# Altium PCB pcb.PcbDoc
Units mm, origin at the board's own origin, x right, y up, seen from the top; angles counter-clockwise.
Board outline 22 x 100 mm, 2 copper layers (Top Layer, Bottom Layer); 61 components, 37 nets, 181 pads, 23 vias.
Unrouted connection lines stored in the file: 84.
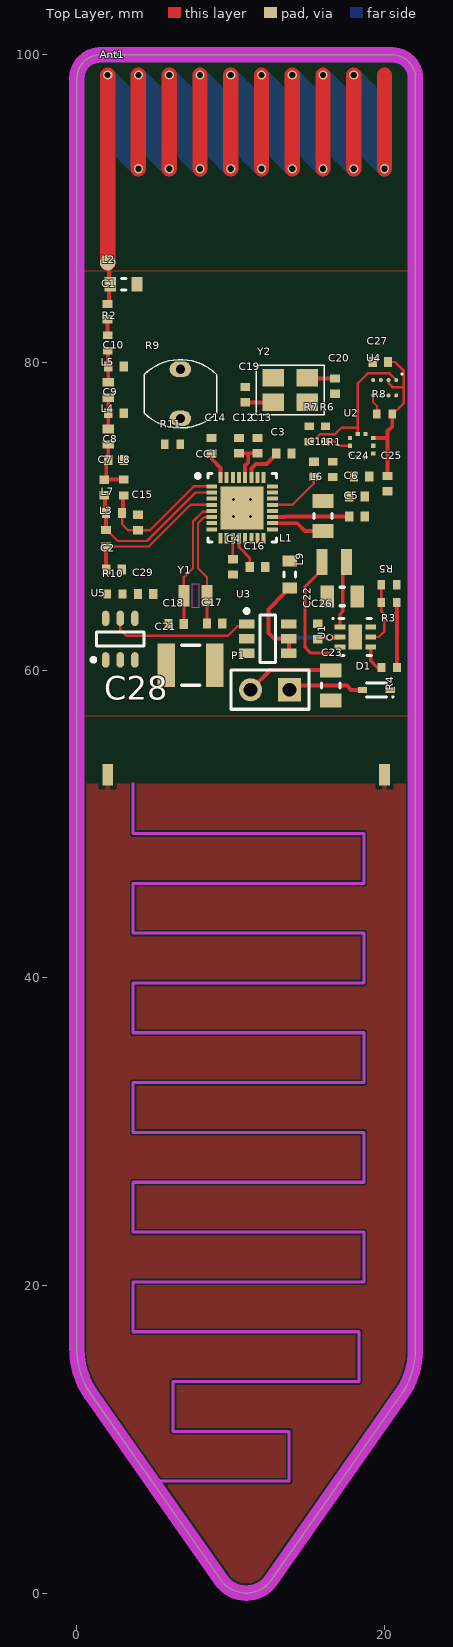
[diagram p0: Top Layer view]
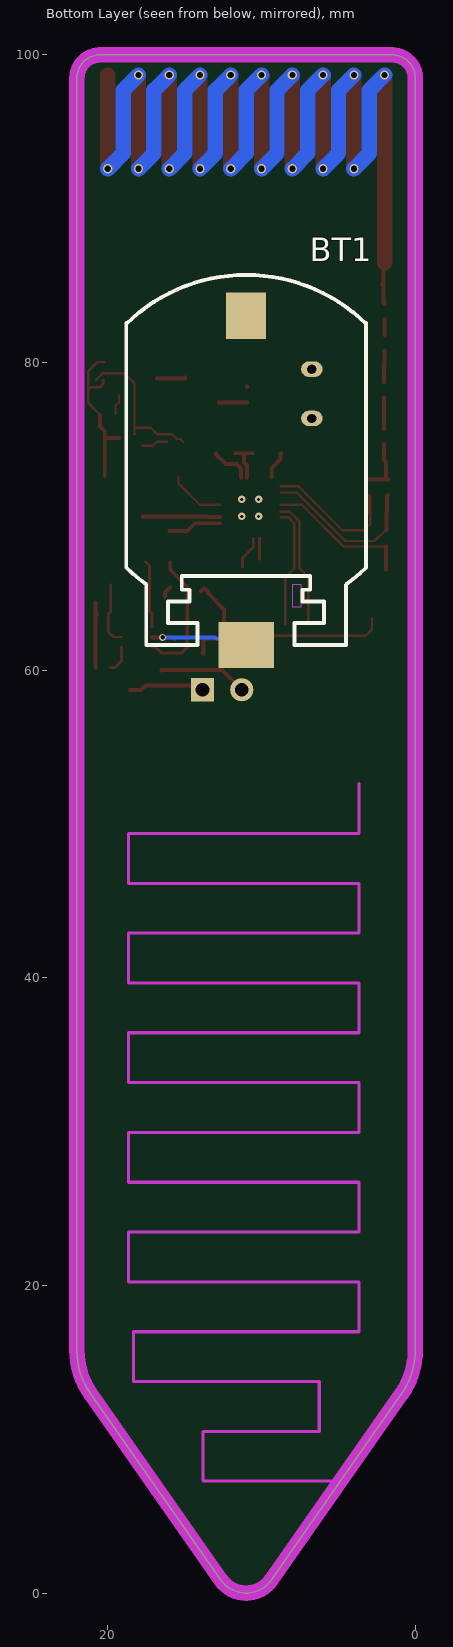
[diagram p1: Bottom Layer view, seen from below]
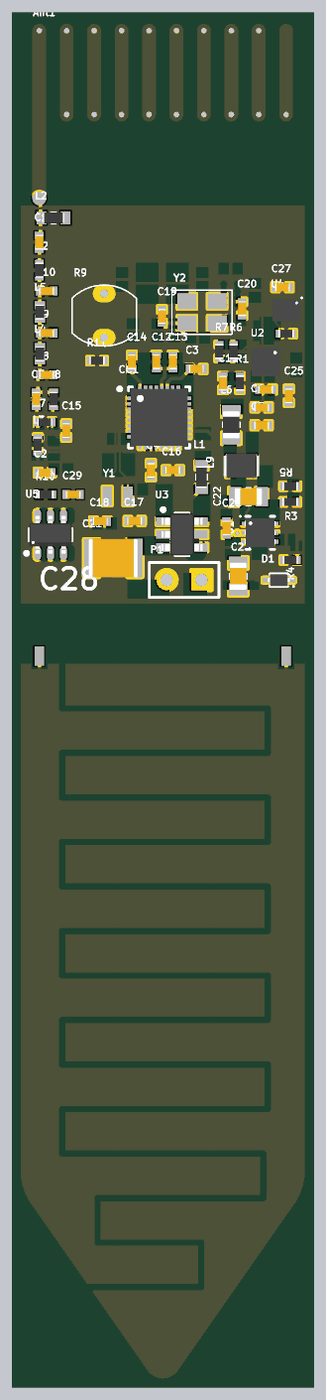
[diagram p2: 3D render of the assembled board from above, using the file's embedded part models]

## Layer stack, top to bottom
Top Solder: solder mask 0.0102, Solder Resist, Dk 3.5
Top Layer: signal copper 0.0356
Dielectric 1: dielectric 0.32, FR-4, Dk 4.8
Bottom Layer: signal copper 0.0356
Bottom Solder: solder mask 0.0102, Solder Resist, Dk 3.5

## Board outline
0.911,12.938 cw(c5.006,15.806) 0.006,15.806 0.006,98.506 cw(c1.506,98.506) 1.506,100.006 20.506,100.006 cw(c20.506,98.506) 22.006,98.506 22.006,15.806 cw(c17.006,15.806) 21.102,12.938 12.645,0.859 cw(c11.006,2.006) 9.368,0.859

## Design rules (kind name [scope] priority, off if disabled: settings)
Clearance [All] p1: gap=0.127 ignorepadtopadclearanceinfootprint=FALSE
Height Height_1 [InComponent('U2')] p1: minheight=0 maxheight=100 prefheight=12.7
Height [All] p2: minheight=0 maxheight=25.4 prefheight=12.7
PlaneClearance [All] p1: clearance=0.127
PlaneConnect [All] p1: planeconnectstyle=Direct reliefexpansion=0.508 reliefentries=4 reliefconductorwidth=0.254 reliefairgap=0.254
PolygonConnect [All] p1: connectstyle=Relief reliefconductorwidth=0.254 reliefentries=4 polygonreliefangle="90 Angle" airgapwidth=0.254
RoutingVias [All] p1: holewidth=0.4 width=0.55 viastyle="Through Hole" minholewidth=0.3 minwidth=0.45 maxholewidth=0.5 maxwidth=0.65
SolderMaskExpansion [All] p1: expansion=0.127
Width Width_1 [InComponent(Ant1)] p1: maxlimit=1.2 minlimit=0.254 preferedwidth=0.254 checkconnectedcopper=TRUE
Width [All] p2: maxlimit=0.254 minlimit=0.127 preferedwidth=0.152 minimp=50.000000 maximp=50.000000 favimp=50.000000
27 further rules are at their usual default settings.

## Components (designator, comment, footprint, x,y, rotation, side; value= is the part's Value field where it differs from the comment)
Ant1 "Antenna 868 Helix" ANTENNA_868_HELIX 2,86.5 r0 top
BT1 "Battery Coin Cell" S8421-45R 10.998,63.2 r180 bottom
C1 "Cap" "0402 (CAP)" 2,83.312 r90 top value=8.2pF
C2 "Cap" "0402 (CAP)" 2.413,66.548 r180 top value=100pF
C3 "Cap" "0402 (CAP)" 13.456,74.09 r180 top value=100nF
C4 "Cap" "0402 (CAP)" 10.14,66.724 r90 top value=100nF
C5 "Cap" "0402 (CAP)" 18.213,69.995 r180 top value=22uF
C6 "Cap" "0402 (CAP)" 18.213,71.286 r180 top value=100nF
C7 "Cap" "0402 (CAP)" 1.778,71.882 r90 top value=3.6pF
C8 "Cap" "0402 (CAP)" 2.54,73.66 r0 top value=2.7pF
C9 "Cap" "0402 (CAP)" 2.54,76.708 r0 top value=6.2pF
C10 "Cap" "0402 (CAP)" 2.54,79.756 r0 top value=3pF
C11 "Cap" "0402 (CAP)" 15.404,73.065 r90 top value=100nF
C12 "Cap" "0402 (CAP)" 10.54,74.606 r270 top value=22uF
C13 "Cap" "0402 (CAP)" 11.74,74.606 r270 top value=100nF
C14 "Cap" "0402 (CAP)" 8.75,74.606 r270 top value=100nF
C15 "Cap" "0402 (CAP)" 3.97,69.609 r90 top value=3.6pF
C16 "Cap" "0402 (CAP)" 11.74,66.724 r180 top value=1uF
C17 "Cap" "0402 (CAP)" 8.957,63.033 r180 top value=12pF
C18 "Cap" "0402 (CAP)" 6.457,63 r0 top value=12pF
C19 "DNM" "0402 (CAP)" 10.947,77.92 r270 top value=12pF
C20 "DNM" "0402 (CAP)" 16.789,78.474 r90 top value=12pF
C21 "GRM32EC70J107ME15L" "1210 (CAP)" 7.391,60.325 r0 top value=100uF
C22 "Cap" "0805 (CAP)" 17.247,64.795 r180 top value=22uF
C23 "Cap" "0805 (CAP)" 16.509,59.004 r90 top value=10uF
C24 "Cap" "0402 (CAP)" 18.513,72.593 r180 top value=100nF
C25 "Cap" "0402 (CAP)" 20.193,72.136 r90 top value=100nF
C26 "Cap" "0402 (CAP)" 15.663,62.523 r270 top value=1uF
C27 "Cap" "0402 (CAP)" 19.731,80.04 r0 top value=100nF
C28 "Chumidity" SOIL_CAP 11,17 r0 top value=1pF
C29 "Cap" "0402 (CAP)" 4.47,64.955 r180 top value=100nF
CC1 "CC1310F32RSMR" CC1310F32RSMR 10.74,70.559 r0 top
D1 "RB751S40T5G" SOD-523 19.467,58.725 r180 top
L1 "BLM18HE152SN1D" "0603 (IND)" 13.837,66.224 r90 top value="1500 Ohm"
L2 "Inductor" "0603 (IND)" 3.04,85.09 r0 top value=68nH
L3 "Inductor" "0402 (IND)" 1.888,68.584 r270 top value=7.5nH
L4 "Inductor" LQW15AN6N8G00D 2.04,75.184 r270 top value=6.8nH
L5 "Inductor" LQW15AN6N8G00D 2.04,78.232 r270 top value=6.8nH
L6 "MLZ2012N6R8LT000" "0805 (IND)" 16.002,70.028 r90 top value=6.8uH
L7 "Inductor" "0402 (IND)" 2.413,70.231 r0 top value=27nH
L8 "Inductor" "0402 (IND)" 3.048,71.882 r270 top value=7.5nH
L9 "Inductor" SRN2009T 16.735,67.041 r0 top value=3.3uH
P1 "Header 2" HDR1X2 13.83,58.735 r180 top
R1 "Res1" "0402 (RES)" 16.631,73.065 r90 top value=4.7K
R2 "DNM" "0402 (RES)" 2,81.28 r270 top value=0
R3 "DNM" "0402 (RES)" 20.295,64.414 r180 top value=0
R4 "Res1" "0402 (RES)" 20.307,60.183 r180 top value=10K
R5 "DNM" "0402 (RES)" 20.295,65.557 r0 top value=0
R6 "Res1" "0402 (RES)" 16.168,75.362 r90 top value=4.7K
R7 "Res1" "0402 (RES)" 15.113,75.362 r90 top value=4.7K
R8 "Res1" "0402 (RES)" 20,76.658 r180 top value=4.7K
R9 "200K - 10K" Photoresistor 6.731,77.974 r270 top
R10 "Rcharge" "0402 (RES)" 2.47,64.955 r0 top value=1k
R11 "Res1" "0402 (RES)" 6.215,74.694 r0 top value=4.7K
U1 "TPS61291" TPS61291 18.106,62.164 r0 top
U2 "BMP388, Pressure sensor" BMP388 18.513,74.593 r0 top
U3 "TPS22860" SOT23-5 12.406,62.05 r0 top
U4 "HDC1010, Humidity, Temp" HDC1010 20.011,78.367 r270 top
U5 "74LVC2G14, Inverting Schmitt Trigger" 74LVC2G14 2.819,62.027 r90 top
Y1 "32.768 kHz" "FC-12M 32.7680KA-A3" 7.707,64.844 r180 top
Y2 "TSX-3225 24.0000MF20G-AC3" "TSX-3225 24.0000MF20G-AC3" 13.868,78.22 r0 top

## Footprints (in the part's own frame and the unit in brackets; to place one, negate y for a bottom-side part, rotate by r counter-clockwise, add the part's x,y. Pads: shape width x height; smd on the part's side, far side on the other; paste and mask are expansions set on the pad)
74LVC2G14 [mm] "TSOP, 6-Leads, Body 2,90x1,50mm, Pitch 0,95mm, IPC Medium Density"
  oval 1x0.5 smd: 1(-1.35,0.95) 2(-1.35,0) 3(-1.35,-0.95) 4(1.35,-0.95) 5(1.35,0) 6(1.35,0.95)
  silkscreen extent -1.47,-1.55 0.45,1.87, body extent -1.38,-1.55 1.38,1.55, height 1.1
"0402 (CAP)" [mm] "Chip Capacitor, 2-Leads, Body 1,60x0,80mm, IPC Medium Density"
  rect 0.54x0.64 smd: 1(-0.5,0) 2(0.5,0)
  body extent -0.55,-0.3 0.55,0.3, height 0.4
"0402 (IND)" [mm] "Chip Inductor, 2-Leads, Body 1,00x0,50mm, IPC Medium Density"
  rect 0.51x0.64 smd: 1(-0.525,0) 2(0.525,0)
  body extent -0.55,-0.3 0.55,0.3, height 0.4
"0402 (RES)" [mm] "Chip Resistor, 2-Leads, Body 1,00x0,50mm, IPC Medium Density"
  rect 0.5x0.6 smd: 1(-0.5,0) 2(0.5,0)
  body extent -0.55,-0.3 0.55,0.3, height 0.4
"0603 (IND)" [mm]
  rect 0.72x0.94 smd: 1(-0.87,0) 2(0.87,0)
  silkscreen extent -0.15,-0.37 0.15,0.37, body extent -0.8,-0.4 0.8,0.4, height 0.6
"0805 (CAP)" [mm] "Chip Capacitor, 2-Leads, Body 2,00x1,25mm, IPC Medium Density"
  rect 0.9x1.4 smd: 1(-0.975,0) 2(0.975,0)
  silkscreen extent -0.15,-0.6 0.15,0.6, body extent -1,-0.63 1,0.63, height 0.6
"0805 (IND)" [mm] "Chip Inductor, 2-Leads, Body 2,00x1,25mm, IPC Medium Density"
  rect 0.9x1.39 smd: 1(-0.98,0) 2(0.98,0)
  silkscreen extent -0.15,-0.6 0.15,0.6, body extent -1,-0.63 1,0.63, height 0.6
"1210 (CAP)" [mm] "Chip Capacitor, 2-Leads, Body 3,20x2,50mm, IPC Medium Density"
  rect 1.15x2.8 smd: 1(-1.575,0) 2(1.575,0)
  silkscreen extent -0.6,-1.3 0.6,1.3, body extent -1.8,-1.4 1.8,1.4, height 2.8
ANTENNA_868_HELIX [mm]
  round 1 smd: 1(0,0)
  Top Layer lines w1: 0,0 0,12.2 ; 2,6.1 2,12.2 ; 4,6.1 4,12.2 ; 6,6.1 6,12.2 ; 8,6.1 8,12.2 ; 10,6.1 10,12.2 ; 12,6.1 12,12.2 ; 14,6.1 14,12.2 ; 16,6.1 16,12.2 ; 18,6.1 18,12.2
  Bottom Layer lines w1: 0,12.2 1,11.2 1,7.1 2,6.1 ; 2,12.2 3,11.2 3,7.1 4,6.1 ; 4,12.2 5,11.2 5,7.1 6,6.1 ; 6,12.2 7,11.2 7,7.1 8,6.1 ; 8,12.2 9,11.2 9,7.1 10,6.1 ; 10,12.2 11,11.2 11,7.1 12,6.1 ; 12,12.2 13,11.2 13,7.1 14,6.1 ; 14,12.2 15,11.2 15,7.1 16,6.1 ; 16,12.2 17,11.2 17,7.1 18,6.1
BMP388 [mm] "LGA, 10-Leads, Body 2,00x2,00mmx0,80mm, Pitch 0,50mm"
  rect 0.275x0.275 smd: 1(0.25,0.762) 2(-0.25,0.762) 3(-0.75,0.5) 4(-0.75,0) 5(-0.75,-0.5) 6(-0.25,-0.763) 7(0.25,-0.763) 8(0.75,-0.5) 9(0.75,0) 10(0.75,0.5)
  body extent -1.02,-1.03 1.65,1.02, height 30
CC1310F32RSMR [mm] "QFN, 32-Leads, Body 4,00x4,00mm, Pitch 0,40mm, Thermal Pad 2,80x2,80mm, IPC Medium Density"
  rect 0.7x0.26 smd: 1(-1.975,1.4) 2(-1.975,1) 3(-1.975,0.6) 4(-1.975,0.2) 5(-1.975,-0.2) 6(-1.975,-0.6) 7(-1.975,-1) 8(-1.975,-1.4) 17(1.975,-1.4) 18(1.975,-1) 19(1.975,-0.6) 20(1.975,-0.2) 21(1.975,0.2) 22(1.975,0.6) 23(1.975,1) 24(1.975,1.4)
  rect 0.26x0.7 smd: 9(-1.4,-1.975) 10(-1,-1.975) 11(-0.6,-1.975) 12(-0.2,-1.975) 13(0.2,-1.975) 14(0.6,-1.975) 15(1,-1.975) 16(1.4,-1.975) 25(1.4,1.975) 26(1,1.975) 27(0.6,1.975) 28(0.2,1.975) 29(-0.2,1.975) 30(-0.6,1.975) 31(-1,1.975) 32(-1.4,1.975)
  rect 2.8x2.8 smd: 33(0,0)
  silkscreen extent -3,-2.22 2.22,2.22, body extent -2.08,-2.08 2.08,2.08, height 1
"FC-12M 32.7680KA-A3" [mm]
  rect 0.7x1.4 smd: 1(-0.75,0) 2(0.75,0)
  Keep-Out Layer region: -0.254,-0.762 0.254,-0.762 0.254,0.762 -0.254,0.762
HDC1010 [mm] "BGA, 8-Leads, Body 1,59x2,04mmx0,68mm, Pitch 0,50mm"
  round 0.26 smd: A1(-0.5,0.75) A2(0.5,0.75) B1(-0.5,0.25) B2(0.5,0.25) C1(-0.5,-0.25) C2(0.5,-0.25) D1(-0.5,-0.75) D2(0.5,-0.75)
  silkscreen extent -0.95,1.08 -0.85,1.18, body extent -0.79,-1.02 0.79,1.02, height 0.67
HDR1X2 [mm] "Connector; Header; 2 Position"
  rect 1.5x1.5 hole 0.9: 1(0,0)
  round 1.5 hole 0.9: 2(2.54,0)
  silkscreen extent -1.27,-1.27 3.81,1.27
LQW15AN6N8G00D [mm] "Chip Inductor, 2-Leads, Body 1,00x0,60mm, IPC Medium Density"
  rect 0.58x0.74 smd: 1(-0.49,0) 2(0.49,0)
  body extent -0.55,-0.35 0.55,0.35, height 0.5
Photoresistor [mm]
  oval 1x1.4 hole 0.6: 1(-1.6,0) 2(1.6,0)
  silkscreen extent -2.22,-2.35 2.22,2.35
S8421-45R [mm]
  rect 3.6x3 smd: 1(0,-1.556)
  rect 2.6x3 smd: 2(0,19.844)
  silkscreen extent -7.8,-1.56 7.8,22.5
SOD-523 [mm] "Molded Diode, 2-Leads, Body 1,20x0,80mm, IPC Medium Density"
  rect 0.6x0.4 smd: 1(-0.9,0) 2(0.9,0)
  silkscreen extent -1.12,-0.45 0.65,0.5, body extent -0.87,-0.45 0.87,0.45, height 0.7
SOIL_CAP [mm]
  rect 0.7x1.4 smd: 1(-9,36.2) 2(9,36.2)
  Keep-Out Layer lines w0.2: -7.339,35.628 -7.339,32.389 7.661,32.389 7.661,29.15 -7.339,29.15 -7.339,25.911 7.661,25.911 7.661,22.672 -7.339,22.672 -7.339,19.434 7.661,19.434 7.661,16.195 -7.339,16.195 -7.339,12.956 7.661,12.956 7.661,9.717 -7.339,9.717 -7.339,6.478 7.661,6.478 7.661,3.239 -7.339,3.239 -7.339,0 7.339,0 7.339,-3.239 -4.749,-3.239 -4.749,-6.478 2.803,-6.478 2.803,-9.717 -5.777,-9.717
SOT23-5 [mm] "SOT23, 5-Leads, Body 2,90x2,80mm, Pitch 0,95mm, IPC Medium Density"
  rect 1x0.6 smd: 1(-1.375,0.95) 2(-1.375,0) 3(-1.375,-0.95) 4(1.375,-0.95) 5(1.375,0) 6(1.375,0.95)
  silkscreen extent -1.5,-1.55 0.5,1.92, body extent -1.5,-1.53 1.5,1.53, height 1.45
SRN2009T [mm] "Molded Inductor, 2-Leads, Body 2,00x1,60mm, IPC Medium Density"
  rect 0.7x1.7 smd: 1(-0.8,0) 2(0.8,0)
  body extent -1.32,-0.9 1.32,0.9, height 0.95
TPS61291 [mm] "SON, 6-Leads, Body 2,00x2,00mm, Pitch 0,65mm, Thermal Pad 1,60x0,89mm, IPC Medium Density"
  rect 0.7x0.3 smd: 1(-0.995,0.65) 2(-0.995,0) 3(-0.995,-0.65) 4(0.995,-0.65) 5(0.995,0) 6(0.995,0.65)
  rect 0.89x1.6 smd: 7(0,0)
  silkscreen extent -1.5,-1.2 1.05,1.25, body extent -1.13,-1.05 1.13,1.05, height 0.8
"TSX-3225 24.0000MF20G-AC3" [mm]
  rect 1.4x1.15 smd: 1(-1.1,-0.8) 2(1.1,-0.8) 3(1.1,0.8) 4(-1.1,0.8)
  silkscreen extent -2.2,-1.6 2.2,1.6

## Part data
C1 C2 C3 C4 C5 C6 C7 C8 C9 C10 C11 C12 C13 C14 C15 C16 C17 C18 C22 C23 C24 C25 C26 C27 C29: "Capacitor", LatestRevisionDate=17-Jul-2002, LatestRevisionNote="Re-released for DXP Platform.", PackageDescription="Radial Cap, Thru-Hole; 2 Leads; 0.3 in Pin Spacing", PackageReference=RAD-0.3, Published=8-Jun-2000, Publisher="Altium Limited"
C19 C20 C21 C28: library part Cap, "Capacitor", LatestRevisionDate=17-Jul-2002, LatestRevisionNote="Re-released for DXP Platform.", PackageDescription="Radial Cap, Thru-Hole; 2 Leads; 0.3 in Pin Spacing", PackageReference=RAD-0.3, Published=8-Jun-2000, Publisher="Altium Limited"
D1: library part "D Schottky", "Schottky Diode", Code_JEDEC=DO-214-AA, LatestRevisionDate=17-Jul-2002, LatestRevisionNote="Re-released for DXP Platform.", PackageDescription="DO-214-AA/SMB; 2 C-Bend Leads; Body 5.3 x 3.6 mm, inc. leads (LxW)", PackageReference=SMB, Published=8-Jun-2000, Publisher="Altium Limited"
L1: library part "Inductor Iron", "Magnetic-Core Inductor", LatestRevisionDate=17-Jul-2002, LatestRevisionNote="Re-released for DXP Platform.", PackageDescription="Axial Device, Thru-Hole; 2 Leads; 0.9 in Pin Spacing", PackageReference=AXIAL-0.9, Published=24-Mar-1999, Publisher="Altium Limited"
L6: library part Inductor, "Inductor", Code_IEC=1005, Code_JEITA=0402, LatestRevisionDate=29-May-2009, LatestRevisionNote="IPC-7351 Footprint Added.", PackageDescription="Chip Inductor", PackageReference=0402-A, Published=8-Jun-2000, Publisher="Altium Limited"
P1: "Header, 2-Pin", LatestRevisionDate=17-Jul-2002, LatestRevisionNote="Re-released for DXP Platform.", Publisher="Altium Limited"
R1 R4 R6 R7 R8 R11: "Resistor", LatestRevisionDate=17-Jul-2002, LatestRevisionNote="Re-released for DXP Platform.", PackageDescription="Axial Device, Thru-Hole; 2 Leads; 0.3 in Pin Spacing", PackageReference=AXIAL-0.3, Published=8-Jun-2000, Publisher="Altium Limited"
R2 R3 R5 R10: library part Res1, "Resistor", LatestRevisionDate=17-Jul-2002, LatestRevisionNote="Re-released for DXP Platform.", PackageDescription="Axial Device, Thru-Hole; 2 Leads; 0.3 in Pin Spacing", PackageReference=AXIAL-0.3, Published=8-Jun-2000, Publisher="Altium Limited"
R9: library part "Photo Resistor"
U2: library part BMP388
U4: library part HDC1010
U5: library part 74LVC2G14
Y1: library part XTAL, "Crystal Oscillator", LatestRevisionDate=17-Jul-2002, LatestRevisionNote="Re-released for DXP Platform.", PackageDescription="Crystal, Thru-Hole; 2 Leads; Body 3.1 x 8.2 mm (Dia.xH)", PackageReference=R38, Published=8-Jun-2000, Publisher="Altium Limited"
Y2: library part Crystal
L2 L3 L4 L5 L7 L8 L9: Code_IEC=1005, Code_JEITA=0402, LatestRevisionDate=29-May-2009, LatestRevisionNote="IPC-7351 Footprint Added.", PackageDescription="Chip Inductor", PackageReference=0402-A, Published=8-Jun-2000, Publisher="Altium Limited"

## Via types
v1: diameter 0.6, hole 0.4, Top Layer to Bottom Layer, tented both sides, 18 vias
v2: diameter 0.5, hole 0.2, Top Layer to Bottom Layer, 4 vias
v3: diameter 0.45, hole 0.3, Top Layer to Bottom Layer, 1 vias

## Nets (pads, with @x,y where several pads share a name; then routed paths per layer and width w, separated by ;. In a path a pad name is that pad's centre, name@x,y a point inside that pad or via, vN(x,y) a via of type N, cw(c..) or ccw(c..) an arc to the next point about the centre after c; other vN are vias at no path point)
BMP_INT: U2.7
DCDC_SW: CC1.18 L6.1 | length 3.5
  Top Layer w0.254: CC1.18 14.329,69.559 14.834,69.054 L6.1@15.996,69.054
DRDYn: CC1.16 R8.2 U4.D2 | length 1.3
  Top Layer w0.127: U4.D2 19.261,77.433 19.5,77.194 R8.2
EN_BYP: CC1.23 R4.2 U1.4 | length 1.8
  Top Layer w0.203: U1.4 19.101,60.61 19.529,60.183 R4.2
GND: BT1.2 C2.1 C3.1 C4.1 C5.1 C6.1 C8.2 C9.2 C10.2 C11.2 C12.1 C13.1 C14.1 C15.2 C16.1 C17.1 C18.1 C19.1 C20.1 C21.1 C22.1 C23.1 C24.1 C25.1 C26.1 C27.1 C28.2 C29.1 CC1.3 CC1.7 CC1.17 CC1.20 CC1.29 CC1.33 L2.2 R5.2 R11.1 U1.6 U1.7 U2.3 U2.5 U2.8 U2.9 U3.2 U4.B2 U4.C1 U4.D1 U5.2 Y2.2 Y2.4 | length 0
  Top Layer w0.254: C19.1 C19.1@10.947,78.466
  other v2: 10.19,70.009 11.29,70.009 10.19,71.109 11.29,71.109
JTAG_TCK: CC1.14
JTAG_TMS: CC1.13
NetAnt1_1: Ant1.1 C1.2 L2.1 | length 2.8
  Top Layer w0.254: C1.2 2.085,83.897 2.085,85.005 L2.1 2.085,85.175 2.085,86.415 Ant1.1
  other v1: 4,92.6 6,92.6 8,92.6 10,92.6 12,92.6 14,92.6 16,92.6 18,92.6 20,92.6 2,98.7 4,98.7 6,98.7 8,98.7 10,98.7 12,98.7 14,98.7 16,98.7 18,98.7
NetBT1_1: BT1.1 D1.1
NetC1_1: C1.1 R2.1 | length 1
  Top Layer w0.254: R2.1 C1.1
NetC2_2: C2.2 CC1.4 L3.2 | length 9.5
  Top Layer w0.152: L3.2@1.9,68.047 2.62,68.047 4.598,68.047 4.674,68.047 7.386,70.759 CC1.4
  Top Layer w0.254: L3.2@1.9,68.047 1.9,66.56 C2.2
NetC7_1: C7.1 CC1.2 L3.1 L7.1 | length 10.8
  Top Layer w0.152: L3.1 1.953,69.109 2.66,68.402 4.558,68.402 7.715,71.559 CC1.2
  Top Layer w0.254: C7.1 1.833,71.327 1.833,70.286 L7.1 L3.1
NetC7_2: C7.2 C8.1 L4.2 L8.1 | length 3.5
  Top Layer w0.254: C7.2 1.79,72.395 3.036,72.395 L8.1 ; C7.2@1.909,72.513 1.909,73.529 C8.1 L4.2
NetC9_1: C9.1 L4.1 L5.2 | length 2.1
  Top Layer w0.254: L4.1 C9.1 L5.2
NetC10_1: C10.1 L5.1 R2.2 | length 2.1
  Top Layer w0.254: R2.2 2.02,80.76 2.02,79.776 C10.1 L5.1
NetC15_1: C15.1 CC1.1 L7.2 L8.2 | length 9.1
  Top Layer w0.152: L7.2 2.938,69.496 3.324,69.109 C15.1 4.757,69.109 7.607,71.959 CC1.1
  Top Layer w0.254: L7.2 2.993,70.286 2.993,71.302 L8.2
NetC16_2: C16.2 CC1.12 | length 2.1
  Top Layer w0.178: CC1.12 10.54,68.001 11.24,67.301 C16.2
NetC17_2: C17.2 CC1.6 Y1.1 | length 7.8
  Top Layer w0.152: Y1.1 8.457,66.052 7.874,66.635 7.874,69.556 8.277,69.959 CC1.6
  Top Layer w0.178: C17.2 Y1.1
NetC18_2: C18.2 CC1.5 Y1.2 | length 8.4
  Top Layer w0.152: Y1.2 6.957,66.052 7.544,66.639 7.544,69.672 8.177,70.305 8.711,70.305 CC1.5
  Top Layer w0.178: C18.2 Y1.2
NetC19_2: C19.2 CC1.31 Y2.1 | length 1.8
  Top Layer w0.254: C19.2 Y2.1
NetC20_2: C20.2 CC1.30 Y2.3 | length 1.9
  Top Layer w0.254: Y2.3 14.968,78.974 C20.2
NetC21_2: C21.2 C23.2 L9.1 P1.2 U1.3 | length 14.4
  Top Layer w0.203: L9.1 15.935,66.541 14.834,65.44 14.834,61.493 15.215,61.112 16.509,61.112 16.911,61.514 U1.3
  Top Layer w0.254: P1.2 12.575,60.02 16.468,60.02 C23.2
NetC28_1: C28.1 R10.1 U5.1
NetCC1_24: CC1.24 R9.2 R11.2
NetD1_2: D1.2 P1.1 | length 5
  Top Layer w0.254: P1.1 14.099,59.004 17.551,59.004 17.831,58.725 D1.2
NetL9_2: L9.2 U1.1 | length 4.4
  Top Layer w0.203: U1.1 17.111,63.646 17.286,63.821 17.286,66.793 L9.2
NetR3_2: R3.2 R5.1 U1.5 | length 4.1
  Top Layer w0.152: U1.5 19.629,62.164 19.975,62.509 19.975,63.646 19.795,63.826 R3.2 R5.1
PWR_ON: CC1.15 U3.6
RESET_N: C11.1 CC1.21 R1.1 | length 3.7
  Top Layer w0.152: CC1.21 14.015,70.759 15.404,72.149 C11.1
SCL: CC1.10 R7.1 U2.2 U4.A1 | length 9.8
  Top Layer w0.152: R7.1 15.287,75.036 15.505,75.036 15.824,75.355 16.789,75.355 17.202,75.768 18.263,75.768 ; U2.2@18.242,75.376 U2.2 18.263,75.768 ; U4.A1 20.329,79.299 18.913,79.299 18.263,78.649 18.263,75.768
SDA: CC1.9 R6.1 U2.4 U4.A2 | length 1.7
  Top Layer w0.152: R6.1 16.81,74.862 17.079,74.593 U2.4
SOIL_HUMIDITY: CC1.22 R10.2 U5.6
V_switch: C24.2 C25.2 C27.2 C29.2 R6.2 R7.2 R8.1 R9.1 U2.1 U2.10 U3.1 U4.B1 U5.5 | length 20.3
  Top Layer w0.127: C27.2 C27.2@20.272,79.999 ; R8.1@20.5,76.608 R8.1
  Top Layer w0.152: U5.5 2.819,62.643 3.227,62.235 9.81,62.235 10.433,62.858 10.889,62.858 U3.1 ; C27.2 20.671,80.04 21.26,79.451 21.26,78.41 ; U4.B1 20.282,78.846 20.282,78.638 20.511,78.41 21.26,78.41 ; R8.1@20.5,76.608 21.26,77.368 21.26,78.41
  Top Layer w0.254: U2.10 20.136,75.093 20.193,75.036 ; C25.2 20.193,75.036 ; R8.1@20.5,76.608 20.5,75.855 20.193,75.548 20.193,75.036
VCC: C22.2 C26.2 L1.1 R3.1 R4.1 U1.2 U3.4 U3.5 | length 16.3
  Top Layer w0.254: 12.81,62.05 12.446,62.415 12.446,63.963 13.494,65.011 13.494,65.121 13.727,65.354 L1.1@13.957,65.124 ; 12.878,62.05 U3.5 U3.4 U3.4@13.849,61.168 ; C26.2 15.781,62.141 v3(16.435,62.141) 17.088,62.141 U1.2 ; C22.2@15.949,65.368 16.272,65.045 C22.2 ; 20.693,63.627 20.699,63.621 ; R4.1@20.801,60.189 R3.1@20.801,64.408
  Bottom Layer w0.254: 12.878,62.052 12.931,62.052 13.02,62.141 v3(16.435,62.141)
VDDIO: U2.6
VDDR: C12.2 C13.2 C14.2 CC1.28 CC1.32 L6.2 | length 4.7
  Top Layer w0.254: C14.2 8.765,74.091 8.765,73.734 9.337,73.162 9.337,72.537 CC1.32 ; C12.2 11.14,74.106 ; CC1.28 10.94,73.308 11.14,73.508 11.14,74.106 ; C13.2 11.14,74.106
VDDS: C3.2 C4.2 C5.2 C6.2 CC1.11 CC1.19 CC1.27 L1.2 R1.2 | length 9
  Top Layer w0.178: C4.2 CC1.11
  Top Layer w0.254: CC1.27 11.343,72.537 11.343,73.111 11.638,73.406 12.322,73.406 12.956,74.04 C3.2 ; CC1.19 13.477,69.959 13.513,69.995 C5.2
pads on no net: CC1.8 CC1.25 CC1.26 U3.3 U4.C2 U5.3 U5.4

## Polygon pours and split planes (outlines as drawn)
no net on Top Layer (solid, shelved, pour order 6): 0,85.979 22.006,85.979 22.006,57.023 0,57.023
GND on Top Layer "Top Layer-GND" (solid, pour order 4): 22.006,52.628 3.661,52.628 3.661,49.389 18.661,49.389 18.661,46.15 3.661,46.15 3.661,42.911 18.661,42.911 18.661,39.672 3.661,39.672 3.661,36.434 18.661,36.434 18.661,33.195 3.661,33.195 3.661,29.956 18.661,29.956 18.661,26.717 3.661,26.717 3.661,23.478 18.661,23.478 18.661,20.239 3.661,20.239 3.661,17 18.339,17 18.339,13.761 6.251,13.761 6.251,10.522 13.803,10.522 13.803,7.283 4.87,7.283 9.368,0.859 11,0.006 12.295,0.477 21.504,13.621 22.006,15.806
NetC28_1 on Top Layer "Top Layer-NetC28_1" (solid, pour order 2): 18.661,49.389 3.661,49.389 3.661,52.628 0,52.628 0,14.58 5.223,7.283 13.803,7.283 13.803,10.522 6.251,10.522 6.251,13.761 18.339,13.761 18.339,17 3.661,17 3.661,20.239 18.661,20.239 18.661,23.478 3.661,23.478 3.661,26.717 18.661,26.717 18.661,29.956 3.661,29.956 3.661,33.195 18.661,33.195 18.661,36.434 3.661,36.434 3.661,39.672 18.661,39.672 18.661,42.911 3.661,42.911 3.661,46.15 18.661,46.15

## Keep-outs
Keep-Out Layer:
  lines w1: 0,15.85 0,98.55 ; 0.006,15.806 ccw(c5.006,15.806) 0.911,12.938 9.368,0.859 ccw(c11.006,2.006) 12.645,0.859 21.102,12.938 ccw(c17.006,15.806) 22.006,15.806 22.006,98.506 ccw(c20.506,98.506) 20.506,100.006 ; 0.006,98.506 cw(c1.506,98.506) 1.506,100.006 ; 1.506,100.006 20.506,100.006 ; 1.506,100.006 1.506,100.006 ; 20.506,100.006 20.506,100.006

## Silkscreen, mask and mechanical layers (free items; w line width, h text height)
Mechanical 1:
  the board outline again, w0.013